# Altium PCB us_#2.PcbDoc
Units mil, origin at the board's own origin, x right, y up, seen from the top; angles counter-clockwise.
Board outline 1397.64 x 1968.5 mil, 2 copper layers (Top Layer, Bottom Layer); 60 components, 46 nets, 211 pads, 12 vias.
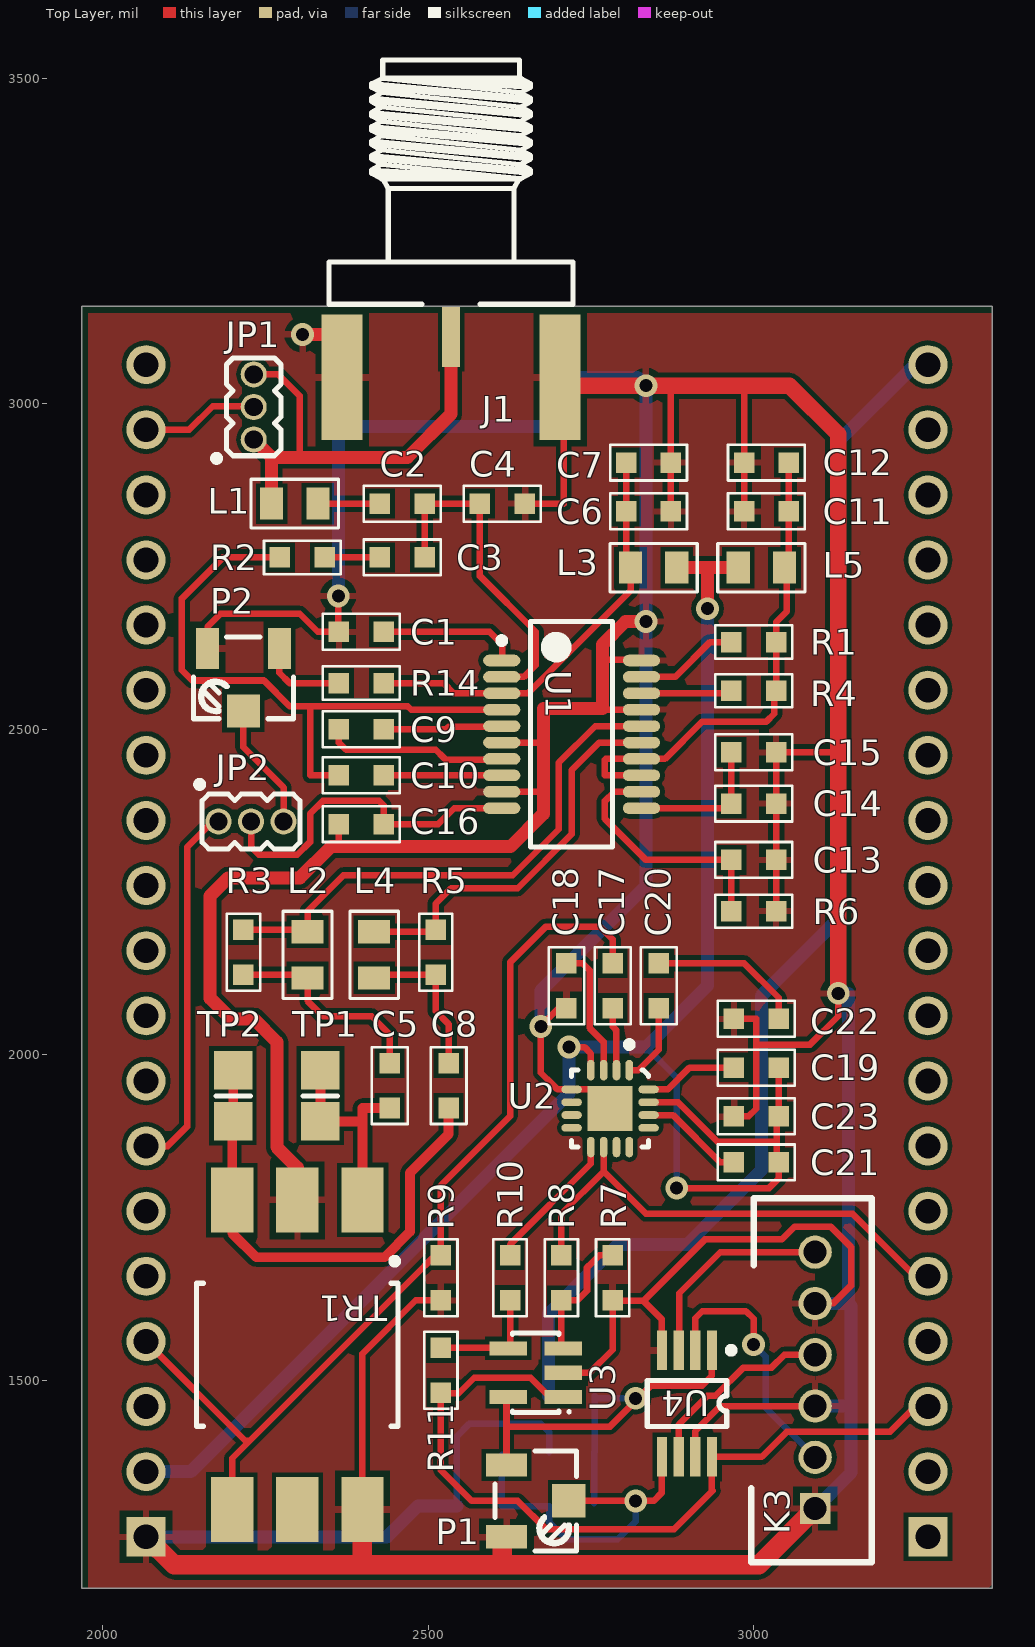
[diagram p0: Top Layer view]
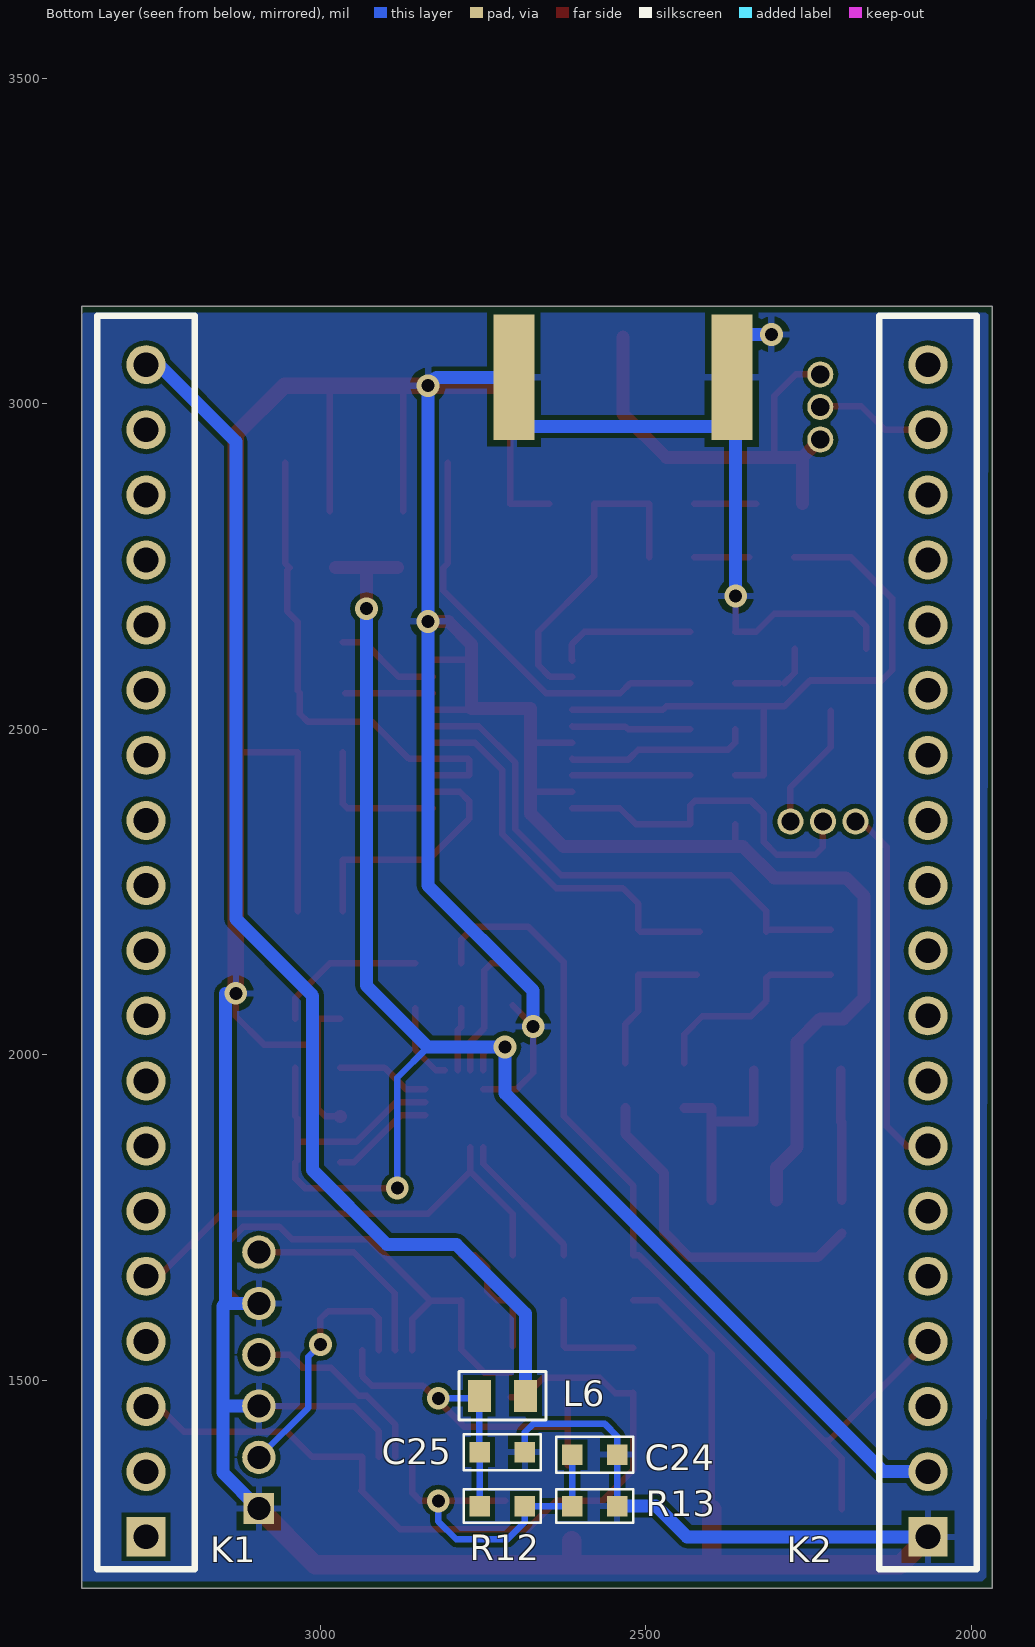
[diagram p1: Bottom Layer view, seen from below]
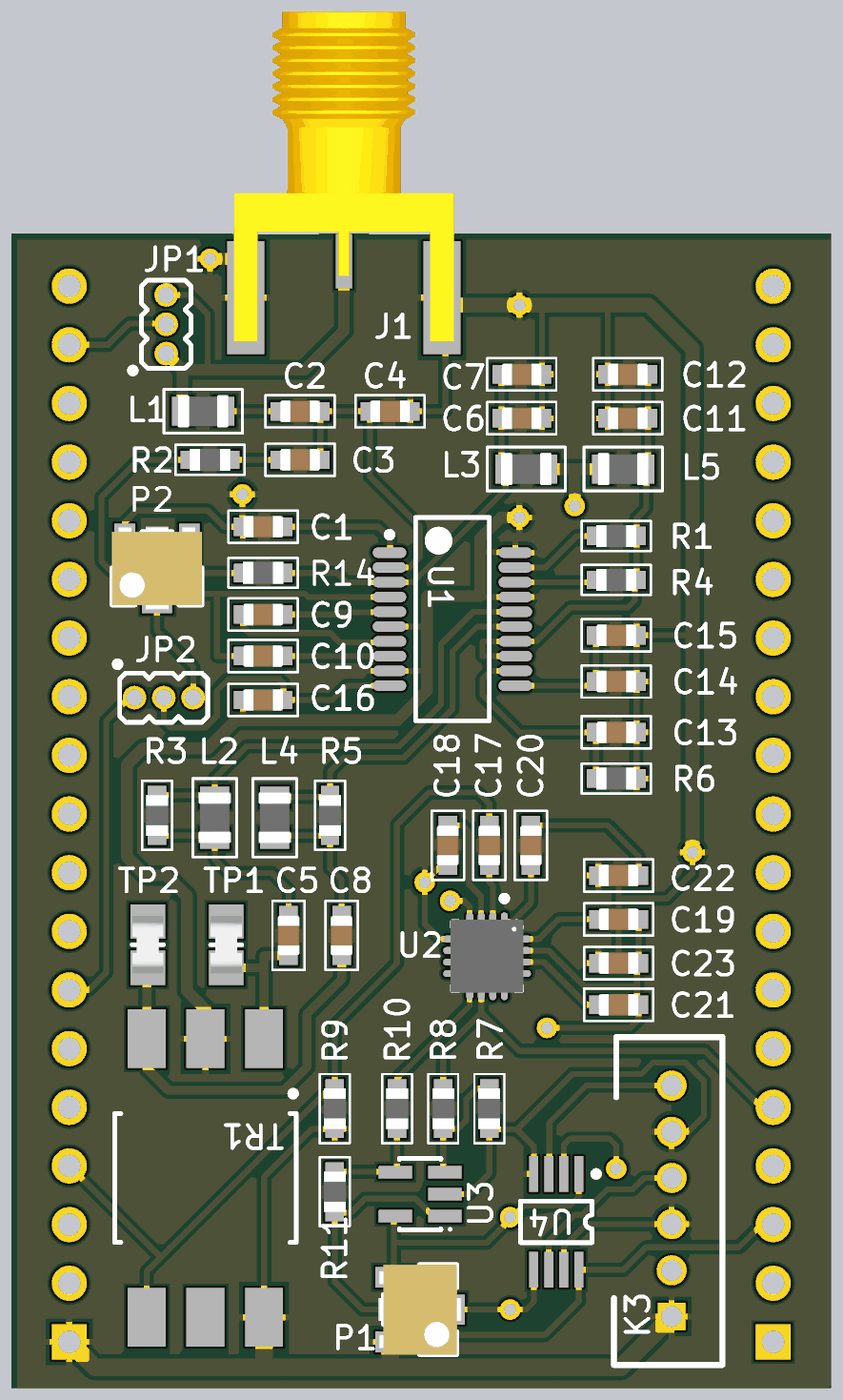
[diagram p2: 3D render of the assembled board from above, using the file's embedded part models]
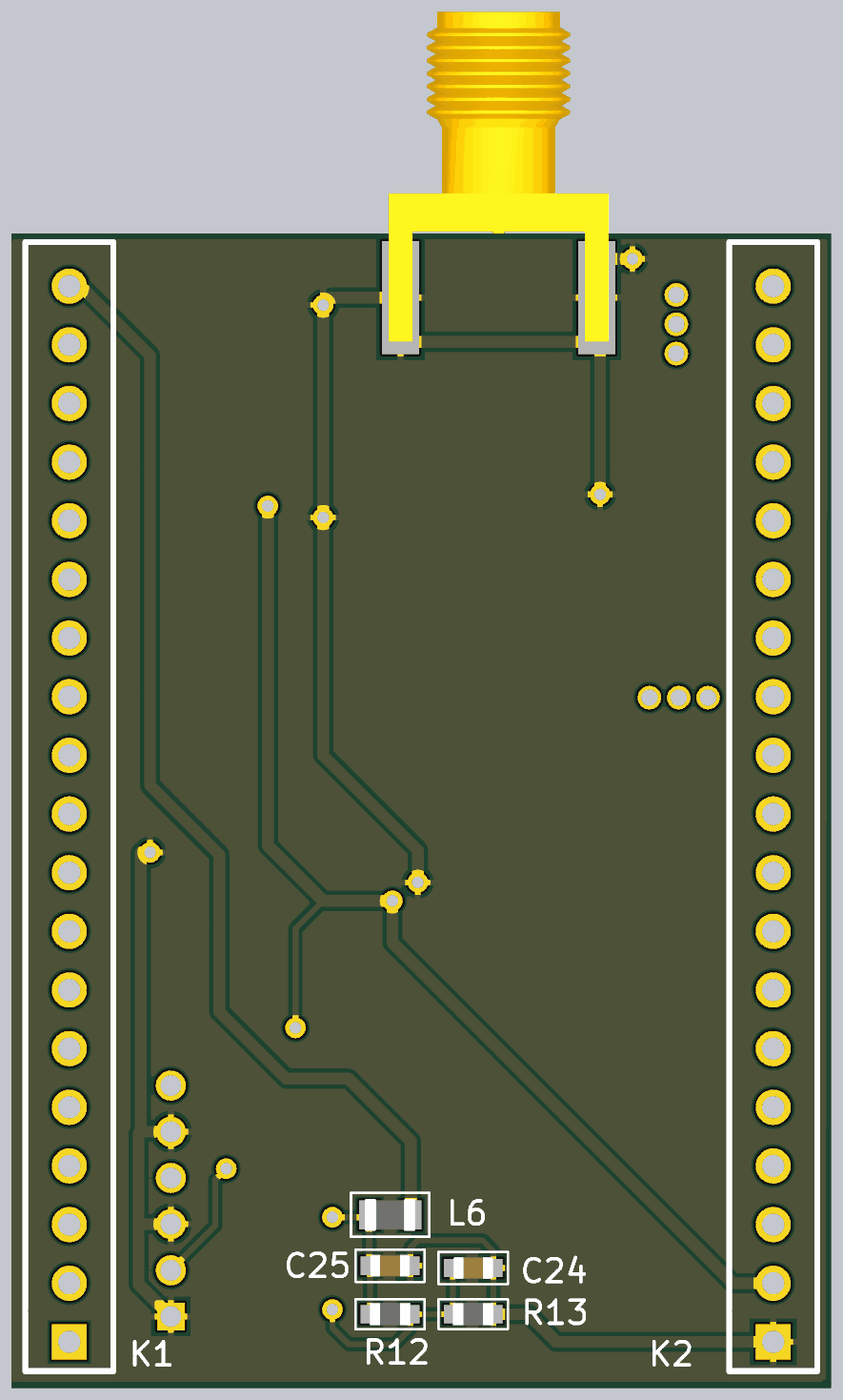
[diagram p3: 3D render of the assembled board from below, using the file's embedded part models]

## Layer stack, top to bottom
Top Solder: solder mask 0.4, Solder Resist, Dk 3.5
Top Layer: signal copper 1.4
Dielectric 1: dielectric 12.6, FR-4, Dk 4.8
Bottom Layer: signal copper 1.4
Bottom Solder: solder mask 0.4, Solder Resist, Dk 3.5

## Board outline
1968.5,1181.1 3366.14,1181.1 3366.14,3149.61 1968.5,3149.61

## Design rules (kind name [scope] priority, off if disabled: settings)
Clearance [All] p1: gap=7
DiffPairsRouting [All] p1: maxlimit=10 minlimit=10 mostfreqgap=10 toplayer_minwidth=15 toplayer_maxwidth=15 toplayer_prefwidth=15 bottomlayer_minwidth=15 bottomlayer_maxwidth=15 bottomlayer_prefwidth=15 maxuncoupledlength=500
MinimumSolderMaskSliver [All] p1: minsoldermaskwidth=0
PolygonConnect [All] p1: connectstyle=Relief reliefconductorwidth=10 reliefentries=4 polygonreliefangle="90 Angle" airgapwidth=10
RoutingVias [All] p1: holewidth=20 width=35 viastyle="Through Hole" minholewidth=20 minwidth=35 maxholewidth=28 maxwidth=50
SilkToSilkClearance [All] p1: silktosilkclearance=7
SilkToSolderMaskClearance [IsPad] p1: minsilkscreentomaskgap=4 clearancetoexposedcopper=TRUE
SolderMaskExpansion [All] p1: expansion=4
Width [All] p1: maxlimit=40 minlimit=10 preferedwidth=10
25 further rules are at their usual default settings.

## Classes and differential pairs
net class RF: NetC2_1 NetC2_2 NetC5_2 NetC8_1 NetC17_2 NetL2_2 NetL4_2 VGA_OUT_N VGA_OUT_P
differential pair VGA_OUT: +VGA_OUT_P -VGA_OUT_N

## Components (designator, comment, footprint, x,y, rotation, side; value= is the part's Value field where it differs from the comment)
C1 "cap0603" "SM0603 _3D_cap" 2397.64,2649.61 r0 top
C2 "cap0603" "SM0603 _3D_cap" 2460.63,2846.46 r180 top
C3 "cap0603" "SM0603 _3D_cap" 2460.63,2763.78 r0 top
C4 "cap0603" "SM0603 _3D_cap" 2614.17,2846.46 r180 top
C5 "cap0603" "SM0603 _3D_cap" 2440.94,1952.76 r90 top
C6 "cap0603" "SM0603 _3D_cap" 2838.58,2834.65 r180 top
C7 "cap0603" "SM0603 _3D_cap" 2838.58,2909.45 r180 top
C8 "cap0603" "SM0603 _3D_cap" 2531.5,1952.76 r270 top
C9 "cap0603" "SM0603 _3D_cap" 2397.64,2500 r0 top
C10 "cap0603" "SM0603 _3D_cap" 2397.64,2429.13 r180 top
C11 "cap0603" "SM0603 _3D_cap" 3019.68,2834.65 r0 top
C12 "cap0603" "SM0603 _3D_cap" 3019.68,2909.45 r0 top
C13 "cap0603" "SM0603 _3D_cap" 3000,2299.21 r180 top
C14 "cap0603" "SM0603 _3D_cap" 3000,2385.83 r180 top
C15 "cap0603" "SM0603 _3D_cap" 3000,2464.57 r180 top
C16 "cap0603" "SM0603 _3D_cap" 2397.64,2354.33 r0 top
C17 "cap0603" "SM0603 _3D_cap" 2783.46,2106.3 r270 top
C18 "cap0603" "SM0603 _3D_cap" 2712.6,2106.3 r90 top
C19 "cap0603" "SM0603 _3D_cap" 3003.94,1980.32 r180 top
C20 "cap0603" "SM0603 _3D_cap" 2854.33,2106.3 r270 top
C21 "cap0603" "SM0603 _3D_cap" 3003.94,1834.65 r180 top
C22 "cap0603" "SM0603 _3D_cap" 3003.94,2055.12 r0 top
C23 "cap0603" "SM0603 _3D_cap" 3003.94,1905.51 r0 top
C24 "cap0603" "SM0603 _3D_cap" 2578.74,1385.83 r0 bottom
C25 "cap0603" "SM0603 _3D_cap" 2720.47,1389.76 r0 bottom
J1 "SMA" AMPHENOL_132357-11 2535.43,3102.36 r270 top
JP1 "Family" SULLINS_GRPB031VWVN 2232.28,2944.88 r90 top (schematic designator Jumper1)
JP2 "Family" SULLINS_GRPB031VWVN 2178.15,2358.27 r0 top (schematic designator Jumper2)
K1 "PLS_2.54mm-19" PLS_2.54mm-19 3267.72,1259.84 r180 bottom
K2 "PLS_2.54mm-19" PLS_2.54mm-19 2066.93,1259.84 r180 bottom
K3 "Molex_89400_061" Molex_89400-061 3094.49,1303.15 r180 top
L1 "75R@100MHz" "SM_0805_INDUCTANCE _3D" 2295.28,2846.46 r180 top
L2 "75R@100MHz" "SM_0805_INDUCTANCE _3D" 2314.96,2153.54 r90 top
L3 "75R@100MHz" "SM_0805_INDUCTANCE _3D" 2846.46,2748.03 r0 top
L4 "75R@100MHz" "SM_0805_INDUCTANCE _3D" 2417.32,2153.54 r90 top
L5 "75R@100MHz" "SM_0805_INDUCTANCE _3D" 3011.81,2748.03 r0 top
L6 "75R@100MHz" "SM_0805_INDUCTANCE _3D" 2720.47,1476.38 r0 bottom
P1 "5k" TRIM_BOURNS_3223W 2665.35,1314.96 r270 top
P2 "5k" TRIM_BOURNS_3223W 2216.54,2578.74 r180 top
R1 "10k" SM0603_3D_res 3000,2633.86 r180 top
R2 "280" SM0603_3D_res 2307.09,2763.78 r0 top
R3 "100" SM0603_3D_res 2216.54,2157.48 r90 top
R4 "10k" SM0603_3D_res 3000,2559.06 r180 top
R5 "100" SM0603_3D_res 2511.81,2157.48 r90 top
R6 "11k" SM0603_3D_res 3000,2220.47 r180 top
R7 "13k" SM0603_3D_res 2783.46,1657.48 r270 top
R8 "5k1" SM0603_3D_res 2704.72,1657.48 r270 top
R9 "75" SM0603_3D_res 2519.68,1657.48 r90 top
R10 "5k1" SM0603_3D_res 2625.98,1657.48 r270 top
R11 "13k" SM0603_3D_res 2519.68,1515.75 r270 top
R12 "1k1" SM0603_3D_res 2720.47,1307.09 r0 bottom
R13 "9k8" SM0603_3D_res 2578.74,1307.09 r0 bottom
R14 "20k" SM0603_3D_res 2397.64,2570.87 r0 top
TP1 "Test Point" NICOMATIC_C12000B 2334.65,1937.01 r90 top
TP2 "Test Point" NICOMATIC_C12000B 2200.79,1937.01 r90 top
TR1 "1:1" XFMR_MINI-CIRCUITS_KK81 2299.21,1539.37 r180 top
U1 "AD8331ARQZ" SOP64P600X175-20N 2720.47,2492.13 r0 top
U2 "ADL5511ACPZ-R7" QFN50P300X300X80-17N-S175 2779.53,1917.32 r270 top
U3 "AD8691" TSOT-5(RT-5) 2665.35,1511.81 r90 top
U4 "AD7274" RM-8 2897.64,1464.57 r180 top

## Footprints (in the part's own frame and the unit in brackets; to place one, negate y for a bottom-side part, rotate by r counter-clockwise, add the part's x,y. Pads: shape width x height; smd on the part's side, far side on the other; paste and mask are expansions set on the pad)
AMPHENOL_132357-11 [mm]
  rect 2.35x0.7 smd: 1(0,0)
  rect 4.9x1.6 smd: 2(1.575,4.25) 2(1.575,-4.25)
  rect 4.9x1.6 smd far side: 2(1.575,4.25) 2(1.575,-4.25)
  silkscreen extent -10.81,-4.76 -1.28,4.76, body extent -10.8,-4.76 3.48,4.76, height 4.08
Molex_89400-061 [mm] "vertical 6 pin 2mm pitch"
  rect 1.2x1.2 hole 0.9: 1(0,0)
  round 1.3 hole 0.9: 2(0,-2) 3(0,-4) 4(0,-6) 5(0,-8) 6(0,-10)
  silkscreen extent -2.2,-12.1 2.5,2.1
NICOMATIC_C12000B [mm]
  rect 1.5x1.5 smd: 1(-1,0) 1(1,0)
  silkscreen extent 0,-0.67 0,0.67, body extent -1.25,-0.67 1.25,0.68, height 1.5
PLS_2.54mm-19 [mil] "soldering pads"
  rect 60x60 hole 38: 1(0,0)
  round 60 hole 38: 2(0,100) 3(0,200) 4(0,300) 5(0,400) 6(0,500) 7(0,600) 8(0,700) 9(0,800) 10(0,900) 11(0,1000) 12(0,1100) 13(0,1200) 14(0,1300) 15(0,1400) 16(0,1500) 17(0,1600) 18(0,1700) 19(0,1800)
  silkscreen extent -75,-50 75,1875
QFN50P300X300X80-17N-S175 [mm]
  oval 0.8x0.3 smd: 1(-1.5,0.75) 2(-1.5,0.25) 3(-1.5,-0.25) 4(-1.5,-0.75) 9(1.5,-0.75) 10(1.5,-0.25) 11(1.5,0.25) 12(1.5,0.75)
  oval 0.3x0.8 smd: 5(-0.75,-1.5) 6(-0.25,-1.5) 7(0.25,-1.5) 8(0.75,-1.5) 13(0.75,1.5) 14(0.25,1.5) 15(-0.25,1.5) 16(-0.75,1.5)
  rect 1.75x1.75 smd: 17(0,0)
  silkscreen extent -2.62,-1.5 1.5,1.5, body extent -1.57,-1.57 1.58,1.58, height 0.8
RM-8 [mm] "Shrink Small Outline, MSOP; 8 Leads; Body Width 3 mm; Pitch 0.65 mm"
  rect 0.4x1.55 smd: 1(-0.975,-2.075) 2(-0.325,-2.075) 3(0.325,-2.075) 4(0.975,-2.075) 5(0.975,2.075) 6(0.325,2.075) 7(-0.325,2.075) 8(-0.975,2.075)
  silkscreen extent -1.85,-2.2 1.55,0.9
"SM0603 _3D_cap" [mm] "standard  0603 inch size"
  rect 0.8x0.8 smd: 1(-0.875,0) 2(0.875,0)
  silkscreen extent -1.5,-0.7 1.5,0.7, body extent -0.87,-0.47 0.88,0.48, height 0.87
SM0603_3D_res [mm] "0603 inch resistor"
  rect 0.8x0.8 smd: 1(-0.875,0) 2(0.875,0)
  silkscreen extent -1.5,-0.65 1.5,0.65, body extent -0.87,-0.47 0.88,0.48, height 0.55
"SM_0805_INDUCTANCE _3D" [mm] "chip inductanse 0805 inch"
  rect 0.9x1.25 smd: 1(-0.9,0) 2(0.9,0)
  silkscreen extent -1.7,-0.95 1.7,0.95, body extent -1.1,-0.7 1.1,0.7, height 1.1
SOP64P600X175-20N [mm]
  oval 1.45x0.45 smd: 1(-2.725,2.88) 2(-2.725,2.24) 3(-2.725,1.6) 4(-2.725,0.96) 5(-2.725,0.32) 6(-2.725,-0.32) 7(-2.725,-0.96) 8(-2.725,-1.6) 9(-2.725,-2.24) 10(-2.725,-2.88) 11(2.725,-2.88) 12(2.725,-2.24) 13(2.725,-1.6) 14(2.725,-0.96) 15(2.725,-0.32) 16(2.725,0.32) 17(2.725,0.96) 18(2.725,1.6) 19(2.725,2.24) 20(2.725,2.88)
  silkscreen extent -2.85,-4.4 1.6,4.4, body extent -2,-4.4 2,4.4, height 1.75
SULLINS_GRPB031VWVN [mil]
  round 40 hole 28: 1(0,0) 2(50,0) 3(100,0)
  silkscreen extent -33,-42 125,61
TRIM_BOURNS_3223W [mm]
  rect 0.9x1.6 smd: 1(-1.4,-1.14) 3(1.4,-1.14)
  rect 1.3x1.3 smd: 2(0,1.29)
  silkscreen extent -1.95,-1.59 1.95,1.59, body extent -1.95,-1.81 1.95,1.81, height 4.16
TSOT-5(RT-5) [mm] "SOT-23/SC-74A; 5 Leads; Body 3.1 x 3 mm, inc. leads (LxW max)"
  rect 0.55x1.45 smd: 1(-0.95,-1.075) 2(0,-1.075) 3(0.95,-1.075) 4(0.95,1.075) 5(-0.95,1.075)
  silkscreen extent -1.57,-1.35 1.55,0.9
XFMR_MINI-CIRCUITS_KK81 [mil]
  rect 64.96x100 smd: 1(-100,-237.5) 2(0,-237.5) 3(100,-237.5) 4(100,237.5) 5(0,237.5) 6(-100,237.5)
  silkscreen extent -155,-149 155,110

## Part data
C1 C2 C3 C4 C5 C6 C7 C8 C9 C10 C11 C12 C13 C14 C15 C16 C17 C18 C19 C20 C21 C22 C23 C24 C25: "Capacitor  0603 inch"
J1: library part Coax_1Female_1Shield
JP1 JP2: library part SULLINS_GRPB031VWVN, "Connector 3 Male"
K3: "6 pin vertical 2mm"
L1 L2 L3 L4 L5 L6: library part Ind_Chip, "chip inductance"
P1 P2: library part "Trimming Potentiometer", "Trimming Potentiometer"
R1 R2 R3 R4 R5 R6 R7 R8 R9 R10 R11 R12 R13 R14: library part Res_0603_1%_EU, "Res_0603_1%_EU"
TP1 TP2: library part NICOMATIC_C12000B
TR1: library part XFMR_MINI-CIRCUITS_T1-6T-KK81, "50 Ohm 0.015 To 300MHz RF Transformers"
U2: "DC to 6 GHz Envelope and TruPwr RMS Detector"
U3: library part OpAmp_TSOT5
U4: "adc serial"

## Via types
v1: diameter 35, hole 20, Top Layer to Bottom Layer, 12 vias

## Nets (pads, with @x,y where several pads share a name; then routed paths per layer and width w, separated by ;. In a path a pad name is that pad's centre, name@x,y a point inside that pad or via, vN(x,y) a via of type N, cw(c..) or ccw(c..) an arc to the next point about the centre after c; other vN are vias at no path point)
3.3VA: C25.2 L6.2 P1.1 R12.2 U3.5 U4.1 | length 717.9
  Top Layer w10: P1.1 2620.47,1429.13 ; U3.5@2620.47,1471.85 2620.47,1429.13 ; U4.1 2936.02,1506.89 2921.26,1492.13 2842.52,1492.13 2779.53,1429.13 2620.47,1429.13
  Bottom Layer w10: R12.2@2754.92,1311.02 C25.2 ; C25.2@2755.91,1390.74 L6.2 2759.84,1472.44 v1(2818.9,1472.44)
ADC: K1.3 R11.2 U3.1 U4.8 | length 1203.9
  Top Layer w10: R11.2 2519.68,1362.2 2566.93,1314.96 2637.8,1314.96 2681.1,1271.65 2877.95,1271.65 2937.01,1330.71 2936.02,1331.69 U4.8 3012.8,1382.87 3051.18,1421.26 3209.45,1421.26 K1.3@3248.03,1459.84 ; R11.2@2520.67,1480.32 2547.24,1480.32 2570.87,1503.94 2657.48,1503.94 2687.01,1474.41 U3.1
ADC_VREF: C24.2 P1.2 R12.1 R13.2 U4.5 | length 566.5
  Top Layer w10: P1.2 v1(2818.9,1314.96) 2846.46,1314.96 2859.25,1327.76 U4.5
  Bottom Layer w10: C24.2 R13.2 R12.1 2686.03,1282.48 2712.6,1255.91 2791.34,1255.91 2818.9,1283.46 v1(2818.9,1314.96)
AGND: C1.1 C4.1 C6.1 C7.1 C11.1 C12.1 C13.1 C14.1 C15.1 C16.1 C18.1 C22.1 C23.1 C24.1 C25.1 J1.2 K2.1 K3.1 K3.3 K3.5 P1.3 P2.3 R6.1 R7.2 R9.1 R13.1 TR1.2 TR1.6 U1.6 U1.9 U1.17 U1.20 U2.5 U2.17 U3.2 U4.4 U4.7 | length 11352.5
  Top Layer w10: P2.3 2161.42,2657.48 2181.1,2677.17 2303.15,2677.17 2330.71,2649.61 C1.1 2362.2,2650.6 v1(2362.2,2704.72) ; 2363.19,2319.88 C16.1 ; TR1.6 2399.21,1540.94 2481.3,1623.03 R9.1 ; U1.9 2675.59,2403.94 2677.17,2405.51 ; U1.6 2676.38,2479.53 2677.17,2480.32 ; C4.1 2708.66,2846.45 J1.2@2708.66,3034.45 ; v1@2673.23,2044.3 C18.1@2704.72,2075.79 ; v1@2673.23,2048.23 v1(2673.23,2043.31) 2673.23,1972.44 2690.94,1954.72 2698.82,1946.85 U2.5 U2.17@2750,1946.85 ; U3.2 2748.03,1511.81 2783.46,1547.24 R7.2 ; 2767.72,2531.5 2769.29,2529.92 U1.17 ; 2767.72,2606.3 2826.97,2606.3 U1.20 ; R7.2@2784.45,1622.05 2830.71,1622.05 ; U4.4 2859.25,1593.5 2830.71,1622.05 ; C6.1 C7.1 2873.03,3027.56 ; U4.7 2910.43,1422.24 2948.82,1460.63 K3.3 ; C23.1@2968.5,1905.51 C23.1 2992.13,1905.51 3003.94,1917.32 3003.94,2015.75 ; C22.1 3003.94,2055.12 3003.94,2015.75 ; C11.1 C12.1 2985.24,3026.57 ; R6.1 C13.1 C14.1 C15.1 3125.99,2464.56 ; K3.5 3122.05,1618.11 3149.61,1645.67 3149.61,1704.72 3118.11,1736.22 3062.99,1736.22 3043.31,1716.54 2925.2,1716.54 2830.71,1622.05 ; v1(3129.92,2094.49) 3129.92,2059.06 3086.61,2015.75 3003.94,2015.75
  Top Layer w20: TR1.2 2299.21,1826.77 2267.72,1858.27 2267.72,2019.68 2232.28,2055.12 2196.85,2055.12 2165.35,2086.61 2165.35,2244.09 2192.91,2271.65 2303.15,2271.65 2351.38,2319.88 2363.19,2319.88 2626.97,2319.88 2677.17,2370.08 2677.17,2402.36 ; v1(2307.09,3106.3) 2307.09,3101.38 2302.17,3106.3 J1.2@2370.08,3106.3 ; 2677.17,2405.51 2677.17,2480.32 2677.17,2531.5 2767.72,2531.5 2767.72,2606.3 2767.72,2629.86 2803.21,2665.35 v1(2834.65,2665.35)
  Top Layer w25: J1.2@2702.76,3040.35 2708.66,3034.45 2715.55,3027.56 v1(2834.65,3027.56) 2873.03,3027.56 3055.12,3027.56 3129.92,2952.76 v1(3129.92,2094.49)
  Top Layer w30: K2.1 2110.24,1216.54 2614.17,1216.54 ; 2399.21,1222.05 TR1.6 ; P1.3@2614.17,1253.54 2614.17,1216.54 ; K3.1 3007.87,1216.54 2614.17,1216.54
  Bottom Layer w10: R13.1 C24.1 2544.29,1414.37 2562.99,1433.07 2673.23,1433.07 2686.03,1420.27 C25.1 ; 3145.67,1618.11 3149.61,1614.17
  Bottom Layer w20: K2.1@2074.8,1259.84 2437.01,1259.84 2484.25,1307.08 R13.1 ; v1(2307.09,3106.3) J1.2@2342.52,3106.3 ; v1(2362.2,2704.72) J1.2@2362.2,3034.45 ; J1.2@2377.95,2964.57 J1.2@2712.6,2964.57 ; v1(2673.23,2043.31) 2673.23,2098.43 2834.65,2259.84 v1(2834.65,2665.35) v1(2834.65,3027.56) 2821.85,3040.35 J1.2@2702.76,3040.35 ; K3.1 3149.61,1358.27 3149.61,1460.63 ; K3.3 3149.61,1460.63 ; K3.5 3145.67,1618.11 3145.67,2094.49 v1(3129.92,2094.49) ; 3149.61,1614.17 3149.61,1460.63
  Bottom Layer w30: K2.1 K2.1@2074.8,1259.84
GAIN: JP2.1 K2.7 | length 560.2
  Top Layer w10: K2.7 2100,1859.84 2129.92,1889.76 2129.92,2318.9 JP2.1@2169.29,2358.27
NetC1_2: C1.2 U1.1 | length 215.1
  Top Layer w10: C1.2 2594.49,2649.61 2614.17,2629.92 2614.17,2606.5 U1.1
NetC2_1: C2.1 C3.2 C4.2 U1.2 | length 510.5
  Top Layer w10: C3.2 C2.1 C4.2 2579.72,2735.24 2665.35,2649.61 2665.35,2598.43 2647.24,2580.31 U1.2
NetC2_2: C2.2 L1.1 | length 95.5
  Top Layer w10: L1.1 C2.2
NetC3_1: C3.1 R2.2 | length 84.6
  Top Layer w10: R2.2 C3.1
NetC5_2: C5.2 L2.1 R3.1 | length 327.4
  Top Layer w10: R3.1 2310.04,2123.03 L2.1 2314.96,2082.68 2338.58,2059.06 2413.39,2059.06 2440.94,2031.5 C5.2
NetC6_2: C6.2 C7.2 L3.1 R14.2 U1.3 | length 650.4
  Top Layer w10: R14.2 2523.62,2570.87 2539.37,2555.12 U1.3 2653.54,2555.12 2811.02,2712.6 L3.1 2804.13,2754.92 C6.2 C7.2
NetC8_1: C8.1 L4.1 R5.1 | length 233.5
  Top Layer w10: L4.1@2422.25,2123.03 R5.1 2511.81,2066.93 2531.5,2047.24 C8.1
NetC9_1: C9.1 U1.7 | length 282.3
  Top Layer w10: C9.1 2363.19,2479.33 2374.02,2468.5 2511.81,2468.5 2523.62,2456.69 2527.56,2452.76 2611.61,2452.76 U1.7
NetC9_2: C9.2 U1.5 | length 183.1
  Top Layer w10: C9.2 2527.56,2500 2531.5,2503.94 2612.4,2503.94 U1.5
NetC10_1: C10.1 U1.8 | length 181.1
  Top Layer w10: C10.1 2535.43,2429.13 U1.8
NetC10_2: C10.2 R2.1 U1.4 | length 953.8
  Top Layer w10: R2.1 2185.04,2763.78 2122.05,2700.79 2122.05,2590.55 2137.8,2574.8 2248.03,2574.8 2287.4,2535.43 2318.9,2535.43 ; C10.2 2318.9,2429.13 2318.9,2535.43 ; U1.4 2474.02,2529.92 2468.5,2535.43 2318.9,2535.43
NetC11_2: C11.2 C12.2 L5.2 R1.1 R4.1 U1.13 U1.14 | length 761.8
  Top Layer w10: U1.13 2771.65,2429.13 2771.65,2452.76 2773.23,2454.33 U1.14 2863.78,2454.33 2921.26,2511.81 3019.69,2511.81 3031.5,2523.62 3031.5,2556.1 R4.1 R1.1 3034.45,2664.37 3051.18,2681.1 L5.2@3051.18,2744.09 ; L5.2 3054.14,2754.92 C11.2 C12.2
NetC13_2: C13.2 R6.2 U1.12 | length 388.3
  Top Layer w10: U1.12 2785.83,2403.94 2771.65,2389.76 2771.65,2362.2 2834.65,2299.21 C13.2 R6.2
NetC14_2: C14.2 C15.2 U1.11 | length 219.5
  Top Layer w10: U1.11 2958.47,2378.74 C14.2 C15.2
NetC16_2: C16.2 JP2.2 U1.10 | length 534
  Top Layer w10: JP2.2@2219.29,2358.27 2228.35,2349.21 2228.35,2318.9 2240.16,2307.09 2299.21,2307.09 2318.9,2326.77 2318.9,2370.08 2338.58,2389.76 2425.2,2389.76 2432.09,2382.87 C16.2 2515.75,2354.33 2540.16,2378.74 U1.10
NetC17_2: C17.2 U2.2 | length 97.9
  Top Layer w10: C17.2 2783.47,2043.3 2789.37,2037.4 U2.2
NetC18_2: C18.2 U2.3 | length 202.2
  Top Layer w10: C18.2 2737.2,2140.75 2748.03,2129.92 2748.03,2041.18 2769.53,2019.68 U2.3@2769.53,1976.53
NetC19_2: C19.2 U2.16 | length 144.8
  Top Layer w10: U2.16 2868.11,1946.85 2901.57,1980.32 ; 2901.58,1980.31 C19.2
NetC20_1: C20.1 C22.2 | length 238.5
  Top Layer w10: C20.1 2985.24,2140.75 3038.39,2087.6 C22.2
NetC20_2: C20.2 U2.1 | length 122.3
  Top Layer w10: U2.1 2822.83,1976.38 2854.33,2007.87 C20.2
NetC21_2: C21.2 U2.14 | length 161.1
  Top Layer w10: U2.14 2875.98,1907.48 2948.82,1834.64 C21.2
NetJ1_1: J1.1 JP1.1 JP1.3 L1.2 | length 710.3
  Top Layer w10: JP1.3 2270.08,3044.88 2303.15,3011.81 2303.15,2917.32
  Top Layer w20: JP1.1 2259.84,2917.32 ; L1.2 2259.84,2917.32 ; J1.1 2535.43,2984.25 2468.5,2917.32 2303.15,2917.32 2259.84,2917.32
NetJumper2_3: JP2.3 P2.2 | length 199.2
  Top Layer w10: P2.2 2216.54,2472.44 2278.54,2410.43 2278.54,2367.52 JP2.3@2269.29,2358.27
NetK3_2: K3.2 U4.2 | length 399.9
  Top Layer w10: U4.2 2910.43,1595.47 2921.26,1606.3 2988.19,1606.3 3000,1594.49 v1(3000,1555.12)
  Bottom Layer w10: v1(3000,1555.12) 3018.69,1536.42 3018.69,1457.68 K3.2
NetK3_4: K3.4 U4.6 | length 303.3
  Top Layer w10: U4.6 2884.84,1432.09 2901.57,1448.82 2929.13,1476.38 2940.94,1476.38 2984.25,1519.68 3027.56,1519.68 3047.24,1539.37 K3.4
NetK3_6: K3.6 U4.3 | length 322.8
  Top Layer w10: U4.3 2885.83,1547.24 2885.83,1633.86 2948.82,1696.85 K3.6
NetL2_2: L2.2 R3.2 U1.16 | length 817.5
  Top Layer w10: R3.2 L2.2@2312.01,2191.93 ; L2.2 2314.96,2220.47 2370.08,2275.59 2629.92,2275.59 2700.79,2346.46 2700.79,2448.82 2756.69,2504.72 U1.16
NetL4_2: L4.2 R5.2 U1.15 | length 607.9
  Top Layer w10: L4.2 R5.2@2508.85,2188.98 ; R5.2 2511.81,2232.28 2535.43,2255.91 2637.8,2255.91 2720.47,2338.58 2720.47,2437.01 2762.99,2479.53 U1.15
NetP2_1: P2.1 R14.1 | length 127.2
  Top Layer w10: P2.1 2271.65,2586.61 2287.4,2570.86 ; 2295.28,2570.87 R14.1
NetR1_2: R1.2 U1.19 | length 160
  Top Layer w10: U1.19 2879.53,2580.31 2933.07,2633.86 R1.2
NetR4_2: R4.2 U1.18 | length 133.9
  Top Layer w10: U1.18 R4.2@2961.61,2555.12
NetR7_1: R7.1 R8.2 U3.3 | length 198.9
  Top Layer w10: U3.3@2704.73,1552.16 R8.2 2729.33,1623.03 2744.09,1637.8 2744.09,1673.23 2751.97,1681.1 2762.79,1691.93 R7.1
NetR10_1: R10.1 U2.9 | length 217.7
  Top Layer w10: R10.1 2625.98,1708.66 2750,1832.68 U2.9
NetR10_2: R10.2 R11.1 U3.4 | length 175.2
  Top Layer w10: R11.1 U3.4@2624.01,1550.19 ; U3.4@2625.99,1552.17 R10.2
V_ENVELOPE: K1.5 R8.1 U2.10 | length 745.5
  Top Layer w10: R8.1 2704.73,1755.91 2769.69,1820.87 ; U2.10 2769.69,1820.87 ; K1.5@3253.15,1654.72 3151.97,1755.91 2834.65,1755.91 2769.69,1820.87
VDD_3.3V: K1.19 L6.1 | length 1878.9
  Bottom Layer w20: L6.1 2685.04,1602.36 2791.34,1708.66 2897.64,1708.66 3011.81,1822.83 3011.81,2090.55 3129.92,2208.66 3129.92,2941.73 K1.19@3248.03,3059.84
VDD_5V: C19.1 C21.1 C23.2 K2.2 L3.2 L5.1 U2.4 U2.15 | length 2801.6
  Top Layer w10: v1(2716.54,2011.81) 2740.16,2011.81 2750,2001.97 U2.4 ; U2.15 2883.86,1927.17 2893.7,1917.32 2944.88,1866.14 3035.43,1866.14 ; v1(2881.89,1795.28) 3023.62,1795.28 3038.38,1810.04 C21.1 ; C21.1@3035.43,1837.59 3035.43,1866.14 ; C19.1 C23.2 3035.43,1902.56 3035.43,1866.14
  Top Layer w20: L3.2 2929.13,2748.03 ; v1(2929.13,2685.04) 2929.13,2748.03 ; L5.1 2929.13,2748.03
  Bottom Layer w10: 2834.65,2011.81 2881.89,1964.57 v1(2881.89,1795.28)
  Bottom Layer w20: K2.2 2135.43,1359.84 2716.54,1940.94 v1(2716.54,2011.81) 2834.65,2011.81 2929.13,2106.3 v1(2929.13,2685.04)
VGA_IN: JP1.2 K2.18 | length 180.8
  Top Layer w10: K2.18 2133.07,2959.84 2169.29,2996.06 2231.1,2996.06 JP1.2
VGA_OUT2: C17.1 K2.4 R9.2 TR1.4 | length 1469.3
  Top Layer w10: K2.4 2219.29,1407.48 2226.38,1407.48 ; TR1.4 2199.21,1380.31 2226.38,1407.48 ; C17.1 2783.47,2177.16 2763.78,2196.85 2681.1,2196.85 2625.98,2141.73 2625.98,1905.51 2519.68,1799.21 R9.2 2510.83,1691.93 2478.1,1659.2 2226.38,1407.48
VGA_OUT_N: C5.1 TP1.1 TR1.1 | length 322.5
  Top Layer w15: TP1.1@2334.65,1976.38 2334.65,1897.64 2395.28,1897.64 ; TR1.1 2399.21,1918.31 C5.1
VGA_OUT_P: C8.2 TP2.1 TR1.3 | length 717.2
  Top Layer w15: 2199.21,1725.98 2236.22,1688.98 2433.07,1688.98 2472.44,1728.35 2472.44,1818.9 2531.5,1877.96 C8.2 ; TR1.3 TP2.1@2199.21,1896.06 ; TP2.1@2200.79,1897.64 TP2.1@2200.79,1976.38
pads on no net: K1.1 K1.2 K1.4 K1.6 K1.7 K1.8 K1.9 K1.10 K1.11 K1.12 K1.13 K1.14 K1.15 K1.16 K1.17 K1.18 K2.3 K2.5 K2.6 K2.8 K2.9 K2.10 K2.11 K2.12 K2.13 K2.14 K2.15 K2.16 K2.17 K2.19 TR1.5 U2.6 U2.7 U2.8 U2.11 U2.12 U2.13

## Polygon pours and split planes (outlines as drawn)
AGND on Bottom Layer "Bottom Layer-No Net" (solid, pour order 2): 1974.41,3139.76 3363.12,3139.76 3366.14,3136.81 3366.14,1191.93 1983.46,1191.93 1977.43,1197.83
AGND on Top Layer "Bottom Layer-No Net" (solid, pour order 4): 1978.35,3138.78 3366.14,3138.78 3366.14,1187.04 3363.11,1184.07 3360.08,1181.1 1978.35,1181.1

## Silkscreen, mask and mechanical layers (free items; w line width, h text height)
Mechanical 1:
  lines w10: 1968.5,1181.1 1968.5,3149.61 3346.46,3149.61 3346.46,1181.1 1968.5,1181.1